# EAGLE board Rocketometer2148 MPU9150 No Oscillators Long (EAGLE 6.2)
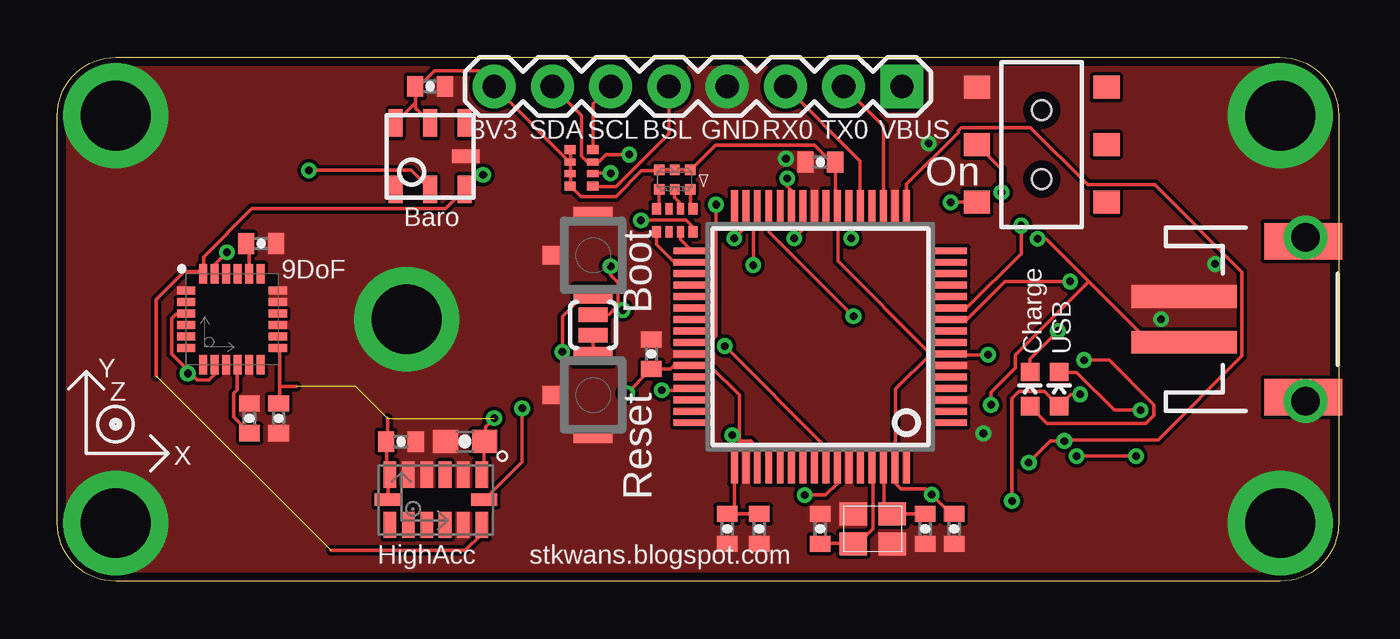
[diagram p0: board, top side]
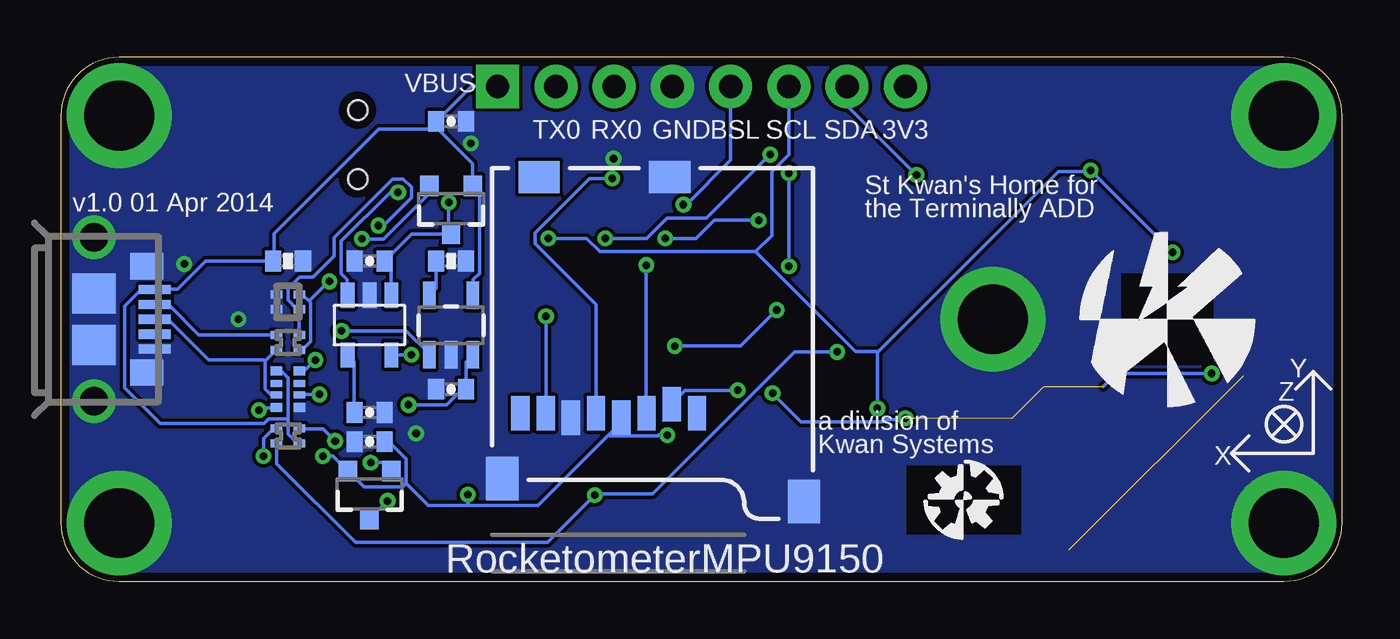
[diagram p1: board, bottom side, seen from below]

Size 55.88 x 22.86 mm. Coordinates in mm from the lower left corner, seen from the top.
Outline: 2.54,22.86 53.34,22.86 arc-90 55.88,20.32 55.88,2.54 arc-90 53.34,0 2.54,0 arc-90 0,2.54 0,20.32 arc-90 2.54,22.86
Copper layers (1*16): Top 0.0356mm / dielectric 1.5011mm / Bottom 0.0356mm
Design rules: minimum track width 6mil, minimum drill 13mil, track to track 6mil, track to pad 6mil, pad to pad 6mil, via to via 6mil, smd to smd 6mil, copper to edge 15mil, drill to drill 6mil, minimum pad ring 7mil, minimum via ring 7mil, stop-mask expansion 4mil, vias tented up to drill 14mil, thermal gap 10mil
Net classes: 0 default: width 0.152 mm, drill 0.33 mm, clearance 0.152 mm; 1 power: width 0.152 mm, drill 0.33 mm, clearance 0.152 mm to class 0, clearance 0.152 mm; 2 hv: width 0.152 mm, drill 0.33 mm, clearance 0.152 mm to class 0, clearance 0.152 mm to class 1, clearance 0.152 mm

## Footprints (pad centres in the part's own frame; a part is rotated, then mirrored left to right if it is on the bottom)
CKCM25 = smd 0.35 x 0.5: 1 -0.325,-0.5; 2 0.325,-0.5; 3 0.325,0.5; 4 -0.325,0.5
0402-CAP = smd 0.7 x 0.9: 1 -0.65,0; 2 0.65,0
0603-CAP = smd 1.1 x 1: 1 -0.85,0; 2 0.85,0
LED-0603 = smd 0.8 x 0.8: A 0,-0.75; C 0,0.75
SOT-23-3 = smd 0.9 x 0.8: 1 -1,0.95; 2 -1,-0.95; 3 1.1,0
SMLP36 = smd 0.45 x 0.45: 1 -0.675,0.425; 2 -0.675,-0.425; 5 0.675,0.425; 6 0.675,-0.425 | smd 0.4 x 0.45: 3 0,0.425; 4 0,-0.425
USB_MICROB_3075 = smd 0.4 x 1.4: 1 -1.3,4.1; 2 -0.65,4.1; 3 0,4.1; 4 0.65,4.1; 5 1.3,4.1 | smd 1.15 x 1.45: P$1 2.32,3.75; P$10 -2.32,3.75 | smd 1.75 x 1.9: P$2 1.125,1.45; P$8 -1.125,1.45 | drill 1.25 pad 1.9: P$3 -3.575,1.45; P$4 3.575,1.45
JST-2-SMD = smd 1 x 4.6: 1 -1,-3.7; 2 1,-3.7 | smd 1.6 x 3.4: NC1 -3.4,1.5; NC2 3.4,1.5
1X08 = drill 1.016 pad 1.88 square: 1 0,0 | drill 1.016 pad 1.88: 2 2.54,0; 3 5.08,0; 4 7.62,0; 5 10.16,0; 6 12.7,0; 7 15.24,0; 8 17.78,0
MICROSD-SOCKET-PP = smd 0.8 x 1.5: 1 -8.94,10.7; 2 -7.84,10.3; 3 -6.74,10.7; 4 -5.64,10.9; 5 -4.54,10.7; 6 -3.44,10.9; 7 -2.34,10.7; 8 -1.24,10.7 | smd 1.8 x 1.4: CD1 -2.05,0.4; CD2 -7.75,0.4 | smd 1.4 x 1.9: GND1 -13.6,14.55; GND3 -0.45,13.55
STANDOFF = drill 3.048 pad 4.572: P$1 0,0
SOT23-3 = smd 0.8 x 0.9: 1 -0.95,-1; 2 0.95,-1; 3 0,1.1
0402-RES = smd 0.7 x 0.9: 1 -0.65,0; 2 0.65,0
CRA02 = smd 0.35 x 0.5: 1 -0.325,-0.5; 2 0.325,-0.5; 3 0.325,0.5; 4 -0.325,0.5
CRA04 = smd 0.4 x 0.5: 1 -0.8,-0.5; 4 0.8,-0.5; 5 0.8,0.5; 8 -0.8,0.5 | smd 0.3 x 0.5: 2 -0.25,-0.5; 3 0.25,-0.5; 6 0.25,0.5; 7 -0.25,0.5
AYZ0202 = smd 1 x 1.15: 1 -2.5,2.825; 2 0,2.825; 3 2.5,2.825; 4 -2.5,-2.825; 5 0,-2.825; 6 2.5,-2.825 | hole 0.85: 1.5,0; -1.5,0
B3U-1100P = smd 0.8 x 1.7: P$1 -1.7,0; P$2 1.7,0 | smd 0.8 x 1.1: P$3 0,-1.65
SJ_2S-NO = smd 0.635 x 1.27: 1 -0.45,0; 2 0.45,0
BMP180 = smd 0.6 x 1.2: 1 1.5,1.45; 2 0,1.45; 3 -1.5,1.45; 4 -1.5,-1.45; 5 0,-1.45; 6 1.5,-1.45 | smd 1.2 x 0.6: 7 1.55,0
SOT-23-5 = smd 0.6 x 1.1: 1 -0.95,-1.3; 2 0,-1.3; 3 0.95,-1.3; 4 0.95,1.3; 5 -0.95,1.3
SOT23-5 = smd 0.55 x 1.2: 1 -0.95,-1.3; 2 0,-1.3; 3 0.95,-1.3; 4 0.95,1.3; 5 -0.95,1.3
SQFP-S-10X10-64 = smd 0.3 x 1.6: 1 -3.75,-5.6; 2 -3.25,-5.6; 3 -2.75,-5.6; 4 -2.25,-5.6; 5 -1.75,-5.6; 6 -1.25,-5.6; 7 -0.75,-5.6; 8 -0.25,-5.6; 9 0.25,-5.6; 10 0.75,-5.6; 11 1.25,-5.6; 12 1.75,-5.6; 13 2.25,-5.6; 14 2.75,-5.6; 15 3.25,-5.6; 16 3.75,-5.6; 33 3.75,5.6; 34 3.25,5.6; 35 2.75,5.6; 36 2.25,5.6; 37 1.75,5.6; 38 1.25,5.6; 39 0.75,5.6; 40 0.25,5.6; 41 -0.25,5.6; 42 -0.75,5.6; 43 -1.25,5.6; 44 -1.75,5.6; 45 -2.25,5.6; 46 -2.75,5.6; 47 -3.25,5.6; 48 -3.75,5.6 | smd 1.6 x 0.3: 17 5.6,-3.75; 18 5.6,-3.25; 19 5.6,-2.75; 20 5.6,-2.25; 21 5.6,-1.75; 22 5.6,-1.25; 23 5.6,-0.75; 24 5.6,-0.25; 25 5.6,0.25; 26 5.6,0.75; 27 5.6,1.25; 28 5.6,1.75; 29 5.6,2.25; 30 5.6,2.75; 31 5.6,3.25; 32 5.6,3.75; 49 -5.6,3.75; 50 -5.6,3.25; 51 -5.6,2.75; 52 -5.6,2.25; 53 -5.6,1.75; 54 -5.6,1.25; 55 -5.6,0.75; 56 -5.6,0.25; 57 -5.6,-0.25; 58 -5.6,-0.75; 59 -5.6,-1.25; 60 -5.6,-1.75; 61 -5.6,-2.25; 62 -5.6,-2.75; 63 -5.6,-3.25; 64 -5.6,-3.75
LLGA24 = smd 0.8 x 0.35: 1 -2,1.25; 2 -2,0.75; 3 -2,0.25; 4 -2,-0.25; 5 -2,-0.75; 6 -2,-1.25; 13 2,-1.25; 14 2,-0.75; 15 2,-0.25; 16 2,0.25; 17 2,0.75; 18 2,1.25 | smd 0.35 x 0.85: 7 -1.25,-1.975; 8 -0.75,-1.975; 9 -0.25,-1.975; 10 0.25,-1.975; 11 0.75,-1.975; 12 1.25,-1.975; 19 1.25,1.975; 20 0.75,1.975; 21 0.25,1.975; 22 -0.25,1.975; 23 -0.75,1.975; 24 -1.25,1.975
ADXL375 = smd 0.55 x 1.145: 1 2,1.097; 2 1.2,1.097; 3 0.4,1.097; 4 -0.4,1.097; 5 -1.2,1.097; 6 -2,1.097; 8 -2,-1.097; 9 -1.2,-1.097; 10 -0.4,-1.097; 11 0.4,-1.097; 12 1.2,-1.097; 13 2,-1.097 | smd 1.145 x 0.55: 7 -2.098,0; 14 2.098,0
CRYSTAL_SMD_2MM_2_5MM = smd 1.2 x 1: 1 -0.85,-0.65; 2 0.85,-0.65; 3 0.85,0.65; 4 -0.85,0.65

## Placement (x,y rotation side)
C023  22pF  [CKCM25]  45.97,12.19 90 bottom
C101  100nF  [0402-CAP]  16.26,21.59 0 top
C201  4.7uF  [0402-CAP]  42.42,6.1 180 bottom
C203  100nF  [0402-CAP]  42.42,7.37 0 bottom
C204  1uF  [0402-CAP]  42.42,13.97 180 bottom
C301  4.7uF  [0402-CAP]  38.86,8.38 180 bottom
C302  4.7uF  [0402-CAP]  38.86,20.07 0 bottom
C423  1uF  [0402-CAP]  33.27,18.29 180 top
C443  100nF  [0402-CAP]  25.91,9.91 90 top
C449  100nF  [0402-CAP]  29.21,2.29 90 top
C451  1uF  [0402-CAP]  30.61,2.29 270 top
C461  33pF  [0402-CAP]  33.27,2.29 270 top
C462  33pF  [0402-CAP]  37.85,2.29 90 top
C463  1uF  [0402-CAP]  39.12,2.29 270 top
C610  100nF  [0402-CAP]  8.38,7.11 90 top
C613  100nF  [0402-CAP]  9.65,7.11 90 top
C620  2.2nF  [0402-CAP]  8.89,14.73 180 top
C901  10uF  [0603-CAP]  17.78,6.1 180 top
C906  100nF  [0402-CAP]  14.99,6.1 0 top
D050  BLUE  [LED-0603]  43.69,8.38 0 top
D301  YELLOW  [LED-0603]  42.42,8.38 0 top
D302  DCC  [SOT-23-3]  38.86,16.26 270 bottom
D401  [SMLP36]  26.92,17.53 180 top
J001  USB_MICROB_JSTGCT  [USB_MICROB_3075]  55.88,11.43 270 bottom
J301  JST 2mm  [JST-2-SMD]  52.83,11.43 270 top
J401  M07  [1X08]  36.83,21.59 180 top
J701  MICROSD-SOCKET  [MICROSD-SOCKET-PP]  37.08,18.03 180 bottom
JP1  STANDOFF  [STANDOFF]  2.54,2.54 0 top
JP2  STANDOFF  [STANDOFF]  2.54,20.32 0 top
JP3  STANDOFF  [STANDOFF]  15.24,11.43 0 top
JP4  STANDOFF  [STANDOFF]  53.34,2.54 0 top
JP5  STANDOFF  [STANDOFF]  53.34,20.32 0 top
Q050  PMOS  [SOT23-3]  42.42,3.81 180 bottom
R011  100k  [0402-RES]  45.97,13.97 180 bottom
R015  10k  [CRA02]  45.97,6.35 270 bottom
R023  33  [CRA02]  45.97,10.41 270 bottom
R053  1.5k  [CRA04]  45.97,8.38 90 bottom
R301  10k  [0402-RES]  38.86,13.97 180 bottom
R401  10k  [CRA04]  22.86,18.03 90 top
R402  1.5k  [CRA04]  26.92,15.75 180 top
S201  AYZ0202  [AYZ0202]  42.93,19.05 270 top
S457  B3U-1100P  [B3U-1100P]  23.37,8.13 270 top
S457A  SOLDERJUMPERNO  [SJ_2S-NO]  23.37,11.18 270 top
S458  B3U-1100P  [B3U-1100P]  23.37,14.22 270 top
U101  BMP180  [BMP180]  16.26,18.54 0 top
U201  5319  [SOT-23-5]  42.42,11.18 180 bottom
U301  73831  [SOT23-5]  38.86,11.18 0 bottom
U401  LPC2148  [SQFP-S-10X10-64]  33.27,10.67 90 top
U601  MPU9150  [LLGA24]  7.62,11.43 0 top
U902  ADXL375  [ADXL375]  16.51,3.56 0 top
U$4  [AXES]  1.27,5.59 0 top
U$5  [KWAN_ACC]  7.62,11.43 0 bottom
U$6  [OSHW_ACC]  16.51,3.56 0 bottom
Y401  12MHz  [CRYSTAL_SMD_2MM_2_5MM]  35.56,2.29 180 top

## Library data of the parts
C023 = KwanSystems; DIGIKEY: 445-1860-1-ND
C101 C203 C443 C449 C610 C613 = SparkFun; DIGIKEY: 445-1265-1-ND
C201 C301 C302 = SparkFun; DIGIKEY: 445-7395-1-ND
C204 C423 C451 C463 = SparkFun; DIGIKEY: 445-4114-1-ND
C461 C462 = SparkFun; DIGIKEY: 445-1241-1-ND
C620 = SparkFun; DIGIKEY: 445-1257-1-ND
C901 = SparkFun; DIGIKEY: 445-7486-1-ND
C906 = SparkFun-Passives; DIGIKEY: 445-1265-1-ND
D050 = SparkFun; DIGIKEY: 350-2037-1-ND; LED_COLOR_3D50: Blue; LED_TRANS_3D50: 0.500000
D301 = SparkFun; DIGIKEY: 350-2032-1-ND; LED_COLOR_3D50: Yellow; LED_TRANS_3D50: 0.500000
D302 = KwanSystems; DIGIKEY: 568-6500-1-ND; LOGO_3D50: NOLOGO
D401 = KwanSystems; DIGIKEY: 846-1097-1-ND
J001 = KwanSystems; DIGIKEY: 609-4616-2-ND; LOGO_3D50: ATMEL
J301 = SparkFun; DIGIKEY: 455-1749-1-ND; LOGO_3D50: NOLOGO
J401 = SparkFun-Connectors; DIGIKEY: $NOPART; HEADER_INVERT_3D50: 0; HEADER_TYPE_3D50: 0
J701 = KwanSystems; DIGIKEY: 101-00581-59-1-ND; LOGO_3D50: NOLOGO
JP1-JP5 = KwanSystems; DIGIKEY: $NOPART
Q050 = SparkFun; DIGIKEY: NTR1P02T1GOSCT-ND; LOGO_3D50: NOLOGO
R011 = SparkFun; DIGIKEY: P100KLCT-ND
R015 = KwanSystems; DIGIKEY: Y5103CT-ND
R023 U$4-U$6 = KwanSystems
R053 R402 = KwanSystems; DIGIKEY: CRA4S81.5KCT-ND
R301 = SparkFun; DIGIKEY: P10.0KLCT-ND
R401 = KwanSystems; DIGIKEY: CRA4S810KCT-ND
S201 = KwanSystems; DIGIKEY: 401-2013-1-ND
S457 S458 = KwanSystems; DIGIKEY: SW1021CT-ND
S457A = SparkFun-Passives; DIGIKEY: $NOPART
U101 = KwanSystems; DIGIKEY: 828-1027-1-ND; LOGO_3D50: NOLOGO
U201 = KwanSystems; DIGIKEY: 576-1910-1-ND
U301 = SparkFun; DIGIKEY: MCP73831T-2ACI/OTCT-ND
U401 = SparkFun; DIGIKEY: 568-1765-ND; LOGO_3D50: NOLOGO
U601 = KwanSystems; DIGIKEY: $NOPART; LOGO_3D50: NOLOGO
U902 = KwanSystems; DIGIKEY: ADXL375BCCZ-ND; LOGO_3D50: NOLOGO
Y401 = KwanSystems; DIGIKEY: 887-1487-1-ND

## Nets
BSL: J401.5 R401.1 U401.41
CONN_D+: J001.3 R023.2 R053.7
CONN_D-: J001.2 R023.1
CS0: J701.2 U401.45
EN: S201.5 U201.3
GND [power]: C023.3 C023.4 C101.2 C201.2 C203.2 C204.2 C301.2 C302.2 C423.2 C443.2 C449.1 C451.2 C461.1 C462.1 C463.2 C610.2 C613.1 C620.1 C901.2 C906.2 J001.5 J001.P$1 J001.P$2 J001.P$3 J001.P$4 J001.P$8 J001.P$10 J301.1 J401.4 J701.6 J701.CD2 J701.GND1 J701.GND3 JP1.P$1 JP2.P$1 JP3.P$1 JP4.P$1 JP5.P$1 R011.1 R053.1 R301.1 S201.4 S457.P$2 S457.P$3 S458.P$1 S458.P$3 U101.7 U201.2 U301.2 U401.3 U401.6 U401.18 U401.25 U401.42 U401.50 U401.59 U601.1 U601.9 U601.11 U601.15 U601.17 U601.18 U902.2 U902.4 U902.5 U902.12 Y401.2 Y401.4
MISO0: J701.7 U401.29
MOSI0: J701.3 U401.30
N$1: C620.2 U601.20
N$2: R301.2 U301.5
N$3: D301.A R053.4
N$4: D301.C U301.1
N$6: D050.A Q050.3 R053.2
N$7: D050.C R053.8
N$9 [power]: S457.P$1 S457A.2
N$13: C610.1 U601.10
N$17: C203.1 U201.4
PWMB: R402.8 U401.31
PWMG: R402.5 U401.34
PWMR: R402.7 U401.33
QWMB: D401.1 R402.1
QWMG: D401.5 R402.4
QWMR: D401.3 R402.2
RESET [power]: R401.2 S457A.1 U401.57
RX0: J401.3 U401.21
SCK0: J701.5 U401.27
SCL0: J401.6 R401.4 U101.5 U401.22 U601.23 U902.14
SDA0: J401.7 R401.3 U101.6 U401.26 U601.24 U902.13
TX0: J401.2 U401.19
USB_ON: R015.2 S458.P$2 U401.58
USB_SOFTCONNECT: Q050.1 R015.4 U401.17
USBD+: C023.2 R023.3 U401.10
USBD-: C023.1 R023.4 U401.11
VBUS [power]: C302.1 D302.1 J001.1 J401.1 R011.2 R015.3 R053.5 U301.4
VCC [power]: C101.1 C201.1 C423.1 C443.1 C449.2 C451.1 C463.1 C613.2 C901.1 C906.1 D401.2 D401.4 D401.6 J401.8 J701.4 Q050.2 R015.1 R401.5 R401.6 R401.7 R401.8 U101.2 U101.3 U201.5 U401.7 U401.23 U401.43 U401.49 U401.51 U401.63 U601.3 U601.8 U601.13 U902.1 U902.6 U902.7
VIN: C204.1 D302.3 S201.6 U201.1
VLIPO [power]: C301.1 D302.2 J301.2 U301.3
XTAL1: C462.2 U401.62 Y401.1
XTAL2: C461.2 U401.61 Y401.3

## Tracks (layer width: path | path; a pad name or v marks a point on that pad's centre or on a via)
BSL  (via drill 0.33)
  Top 0.152: J401.5 26.67,19.53 24.36,17.22 R401.1 | v28.73,16.43 28.73,10.69 28.47,10.44 27.69,10.44 U401.41
  Bottom 0.152: v28.73,16.43 28.6,16.43 26.67,18.36 J401.5
CONN_D+
  Bottom 0.152: 46.97,9.6 46.97,8.38 46.74,8.15 46.48,8.15 R053.7 | 46.97,9.6 46.48,10.08 R023.2 | J001.3 51.21,11.43 49.43,9.65 47.02,9.65 46.97,9.6
CONN_D-
  Bottom 0.152: R023.1 46.48,10.74 49.86,10.74 51.18,12.06 51.77,12.06 J001.2
CS0  (via drill 0.33)
  Top 0.152: v26.36,8.33 27.58,8.33 27.66,8.41 U401.45
  Bottom 0.152: v26.36,8.33 28.65,8.33 29.23,7.75 J701.2
EN  (via drill 0.33)
  Top 0.152: v41.17,16.97 41.17,17.98 S201.5
  Bottom 0.152: v41.17,16.97 41.53,16.97 43.66,14.83 43.66,13.44 43.38,13.16 43.38,12.5 U201.3
GND  (via drill 0.33)
  other vias: 48.13,11.43 50.5,13.84 31.78,18.44 38,19.1 40.39,6.45
  pour Top (no thermals): 2.54,22.86 53.34,22.86 55.88,22.86 55.88,2.54 arc-90 53.34,0 2.54,0 arc-90 0,2.54 0,20.32 arc-90
  pour Bottom (no thermals): 2.54,22.86 53.34,22.86 55.88,22.86 55.88,2.54 arc-90 53.34,0 2.54,0 arc-90 0,2.54 0,20.32 arc-90
MISO0  (via drill 0.33)
  Top 0.152: v34.72,11.56 31.04,15.24 31.04,16.26 U401.29
  Bottom 0.152: v34.72,11.56 34.72,7.34 J701.7
MOSI0  (via drill 0.33)
  Top 0.152: v30.35,13.79 30.35,15.32 30.5,15.47 30.5,16.26 U401.30
  Bottom 0.152: v30.35,13.79 30.35,7.34 J701.3
N$1
  Top 0.152: U601.20 8.36,13.41 8.36,14.63 8.26,14.73 C620.2
N$2
  Bottom 0.152: R301.2 39.52,13.97 39.52,12.78 39.8,12.5 U301.5
N$3  (via drill 0.33)
  Top 0.152: v44.78,9.65 45.87,9.65 47.83,7.7 47.83,7.24 47.47,6.88 43.16,6.88 D301.A
  Bottom 0.152: v44.78,9.65 45.24,9.2 45.47,9.2 R053.4
N$4  (via drill 0.33)
  Top 0.152: D301.C 42.42,9.7 v43.64,10.92
  Bottom 0.152: v43.64,10.92 40.82,10.92 39.83,9.93 39.83,9.88 U301.1
N$6  (via drill 0.33)
  Top 0.152: v44.6,8.15 44.2,8.15 43.69,7.64 D050.A 43.64,7.7 43.05,8.28 41.94,8.28 41.63,7.98 v41.63,3.5
  Bottom 0.152: v44.6,8.15 45.47,8.15 R053.2 | v41.63,3.5 Q050.3
N$7  (via drill 0.33)
  Top 0.152: v47.24,7.47 46.1,7.47 44.45,9.12 43.69,9.12 D050.C
  Bottom 0.152: v47.24,7.47 47.14,7.57 46.48,7.57 R053.8
N$9
  Top 0.152: S457.P$1 S457A.2
N$13
  Top 0.152: U601.10 7.85,9.45 7.85,8.36 7.7,8.2 7.7,7.16 8.38,6.48 C610.1
N$17
  Bottom 0.152: C203.1 43.08,9.58 43.36,9.86 U201.4
PWMB  (via drill 0.33)
  Top 0.152: v25.45,15.75 27.41,15.75 27.71,15.44 27.71,15.27 R402.8 | v29.52,14.96 30.02,15.47 30.02,16.26 U401.31
  Bottom 0.152: v25.45,15.75 27.38,15.75 28.17,14.96 v29.52,14.96
PWMG
  Top 0.152: R402.5 26.14,15.24 26.14,14.68 26.9,13.92 U401.34
PWMR
  Top 0.152: R402.7 27.18,14.91 U401.33
QWMB
  Top 0.152: D401.1 27.61,16.36 R402.1
QWMG
  Top 0.152: D401.5 26.24,17.09 26.24,16.36 26.14,16.26 R402.4
QWMR
  Top 0.152: D401.3 26.92,16.74 27.15,16.51 27.15,16.26 R402.2
RESET  (via drill 0.33)
  Top 0.152: v24.13,17.8 23.37,17.8 R401.2 | v24.13,13.74 24.13,13.36 24.46,13.03 24.46,12.04 | 24.46,12.04 24.05,11.63 S457A.1 | v29.11,10.26 33.5,5.87 33.5,5.08 U401.57 | 24.46,12.04 v24.66,11.84
  Bottom 0.152: v24.13,13.74 v24.13,17.8 | v29.11,10.26 26.24,10.26 v24.66,11.84
RX0
  Top 0.152: J401.3 35,18.34 35,16.28 U401.21
SCK0  (via drill 0.33)
  Top 0.152: v31.83,17.58 31.83,17.25 32,17.07 32,16.28 U401.27
  Bottom 0.152: v31.83,17.58 32.82,17.58 35.2,15.19 35.2,14.73 32.54,12.06 J701.5
SCL0  (via drill 0.33)
  Top 0.152: J401.6 23.37,20.83 23.37,18.85 R401.4 | v7.39,14.35 6.88,13.84 6.88,13.41 U601.23 | v10.97,17.93 15.42,17.93 U101.5 | v20.27,7.54 20.27,5.21 U902.14 | v34.62,14.96 34.54,15.04 34.54,16.26 U401.22
  Bottom 0.152: v7.39,14.35 v10.97,17.93 11.02,17.88 12.37,17.88 20.27,9.98 | 20.27,9.98 v20.27,7.54 | v34.62,14.96 32.94,14.96 32.36,14.38 25.58,14.38 | 25.58,14.38 21.23,10.03 20.32,10.03 20.27,9.98 | J401.6 24.13,18.62 24.87,17.88 24.87,15.09 25.58,14.38
SDA0  (via drill 0.33)  (1 unrouted)
  Top 0.152: J401.7 22.86,20.32 22.86,18.54 23.11,18.29 23.34,18.29 R401.3 23.42,18.31 23.62,18.31 23.93,18.62 v24.94,18.62 | v32.13,14.96 32.51,15.34 32.51,16.26 U401.26 | 11.94,1.35 17.78,1.35 18.49,2.06 18.49,2.44 U902.13 | 4.32,8.97 4.32,12.29 5.54,13.51 6.33,13.51 U601.24 6.38,14.15 8.48,16.26 16.94,16.26 17.75,17.07 U101.6 17.83,17.12 18.44,17.73 v18.57,17.73
  Bottom 0.152: v32.13,14.96 30.33,14.96 29.44,15.85 27.71,15.85 v24.94,18.62 | J401.7 21.59,20.75 v18.57,17.73
TX0
  Top 0.152: J401.2 36.02,19.86 U401.19
USB_ON  (via drill 0.33)
  Top 0.152: v32.59,3.76 33.5,3.76 34.01,4.27 34.01,5.05 U401.58 | v22.02,10.01 22.02,11.56 22.99,12.52 S458.P$2
  Bottom 0.152: R015.2 46.46,6.02 46.46,5.13 43.03,1.7 34.65,1.7 v32.59,3.76 32.54,3.81 30.07,3.81 23.88,10.01 v22.02,10.01
USB_SOFTCONNECT  (via drill 0.33)
  Top 0.152: v42.37,5.18 43.31,6.12 v43.92,6.12 43.97,6.17 48.01,6.17 51.66,9.83 51.66,13.49 47.85,17.3 44.93,17.3 42.44,19.79 39.42,19.79 39.29,19.66 39.29,19.58 37.03,17.32 37.03,16.28 U401.17
  Bottom 0.152: v43.92,6.12 44.45,6.66 45.47,6.66 R015.4 | v42.37,5.18 41.83,5.18 41.48,4.83 Q050.1
USBD+  (via drill 0.33)
  Top 0.152: v44.17,13.08 41.33,13.08 39.67,11.43 38.89,11.43 U401.10
  Bottom 0.152: 45.06,12.22 45.34,12.5 45.47,12.5 C023.2 | 45.06,12.22 44.98,12.14 44.98,10.46 45.34,10.11 45.47,10.11 R023.3 | 45.06,12.22 44.2,13.08 v44.17,13.08
USBD-  (via drill 0.33)
  Top 0.152: v42.04,15.52 42.04,14.3 39.67,11.94 38.89,11.94 U401.11
  Bottom 0.152: R023.4 45.49,10.74 45.49,11.86 C023.1 45.57,11.86 45.97,12.27 45.97,12.78 45.47,13.28 44.88,13.28 43.97,14.2 43.97,14.99 41.4,17.55 40.95,17.55 40.59,17.2 40.59,16.74 41.81,15.52 v42.04,15.52
VBUS
  Bottom 0.152: 45.97,7.09 45.97,8.87 46.28,9.17 46.46,9.17 R053.5 | 45.97,7.09 45.97,6.43 45.59,6.04 45.49,6.04 R015.3 | 45.97,7.09 46.81,7.09 47.02,6.88 51.54,6.88 53.09,8.43 53.09,12.01 52.4,12.7 51.84,12.7 J001.1 51.77,12.75 50.77,12.75 49.55,13.97 R011.2 46.58,14.02 46.58,15.16 42.01,19.74 39.55,19.74 C302.1 | C302.1 39.5,20.07 39.5,19.79 37.92,18.21 37.92,17.27 D302.1 37.87,17.2 37.62,16.94 37.62,13.44 37.9,13.16 37.9,12.5 U301.4 | J401.1 37.97,21.59 39.45,20.12 C302.1
VCC  (via drill 0.33)  (5 unrouted)
  Top 0.152: v40.59,9.88 38.91,9.88 38.89,9.91 U401.7 38.81,9.88 38.05,9.88 | C463.1 38.96,2.95 v38.12,3.79 37.87,4.04 36.78,4.04 36.52,4.29 36.52,5.05 U401.63 36.55,5.13 36.55,8.38 38.05,9.88 | 15.62,20.83 15.62,20.65 16.26,20.02 U101.2 | 15.62,20.83 15.62,21.59 C101.1 15.67,21.64 15.82,21.64 16.46,22.28 18.36,22.28 J401.8 22.3,18.34 R401.6 | U101.3 14.76,20.02 15.57,20.83 15.62,20.83 | R401.6 22.38,18.26 22.38,17.86 R401.7 22.38,17.78 22.38,17.25 R401.8 22.43,17.2 22.84,16.79 24.36,16.79 25.48,17.91 26.19,17.91 D401.6 26.26,17.96 D401.4 26.98,17.96 27.58,17.96 D401.2 27.66,17.98 28.7,19.02 33.02,19.02 33.73,18.31 33.86,18.31 C423.1 33.93,18.29 33.93,16.36 U401.23 34.04,16.2 34.04,13.97 38,10.01 38,9.93 38.05,9.88 | R401.5 22.38,18.82 22.38,18.34 R401.6 | 5.74,9.14 6.1,8.79 6.63,8.79 6.86,9.02 6.86,9.45 U601.8 | 5.74,9.14 4.98,9.91 4.98,11.46 5.18,11.66 5.61,11.66 U601.3 | 9.7,8.51 9.7,7.82 9.65,7.77 C613.2 | 9.7,8.51 9.7,10.01 9.63,10.08 9.63,10.16 U601.13 | U902.1 18.52,4.67 18.62,4.78 18.62,6.1 C901.1 18.67,6.15 18.67,6.73 v19.05,7.11 | U902.7 14.43,3.56 14.43,4.65 U902.6 14.5,4.67 14.35,4.83 14.35,6.1 C906.1 14.4,6.15 14.4,7.11 | 10.41,8.51 9.7,8.51 | v5.69,9.07 5.69,9.09 5.74,9.14 | C451.1 C449.2 29.54,3 29.54,5.05 U401.49 29.57,5.13 29.57,5.89 29.79,6.12 | 29.79,6.12 30.25,6.12 30.5,5.87 30.5,5.08 U401.51 | 29.74,6.38 29.74,6.17 29.79,6.12 | 29.74,6.38 29.74,8.13 28.47,9.4 27.74,9.4 U401.43 27.66,9.4 26.87,9.4 26.75,9.27 25.91,9.27 C443.1 25.86,9.22 v24.84,8.2 | v44.45,5.46 v47.04,5.46 | v29.44,6.38 29.74,6.38
  Bottom 0.152: v40.59,9.88 41.45,9.88 U201.5 | v5.69,9.07 9.86,9.07 10.41,8.51 | v47.04,5.46 47.04,6.22 46.61,6.66 46.48,6.66 R015.1 | v44.45,5.46 44.02,5.46 43.38,4.83 Q050.2 43.31,4.78 42.65,4.12 40.97,4.12 40.82,4.27 | C201.1 41.58,6.1 40.82,5.33 40.82,4.27 | 31.98,6.4 35.08,3.3 38.12,3.3 | 31.98,6.4 31.45,6.93 31.45,7.11 J701.4 | 38.12,3.3 39.85,3.3 40.82,4.27 | v29.44,6.38 29.82,6.38 29.84,6.35 31.93,6.35 31.98,6.4 | v24.84,8.2 23.6,6.96 20.04,6.96 19.94,7.06 19.1,7.06 v19.05,7.11 | 38.12,3.3 v38.12,3.79
VIN  (via drill 0.33)
  Top 0.152: v38.96,16.54 40.08,16.54 S201.6
  Bottom 0.152: U201.1 41.48,12.5 41.48,14.15 C204.1 41.76,13.97 40.59,15.14 38.86,15.14 D302.3 38.96,15.19 v38.96,16.54
VLIPO  (via drill 0.33)
  Top 0.152: v42.75,14.94 43.13,14.94 44.98,13.08 | 44.98,13.08 47.62,10.44 J301.2 | v40.72,7.7 40.72,8.23 41.78,9.3 41.78,9.88 44.98,13.08
  Bottom 0.152: U301.3 37.92,9.86 38.2,9.58 C301.1 38.28,8.36 38.41,8.36 39.06,7.7 v40.72,7.7 | v42.75,14.94 41.81,14.94 39.83,16.92 39.83,17.25 D302.2
XTAL1
  Top 0.152: C462.2 36.42,2.95 Y401.1 36.4,3.02 36.04,3.38 36.04,5.05 U401.62
XTAL2
  Top 0.152: C461.2 33.27,1.65 34.7,1.65 Y401.3 34.91,1.64 35.56,2.29 35.56,5.03 35.53,5.05 U401.61

## Text on the board
tPlace: 3V3 | SDA | SCL | BSL | GND | RX0 | TX0 | VBUS | On | Baro | 9DoF | Boot | Charge | USB | Reset | HighAcc | stkwans.blogspot.com
bPlace: VBUS | 3V3 | SDA | SCL | BSL | GND | RX0 | TX0 | St Kwan's Home for | the Terminally ADD | v1.0 01 Apr 2014 | a division of | Kwan Systems | RocketometerMPU9150